# EAGLE board TOP_SENSOR_V1 (EAGLE 6.4)
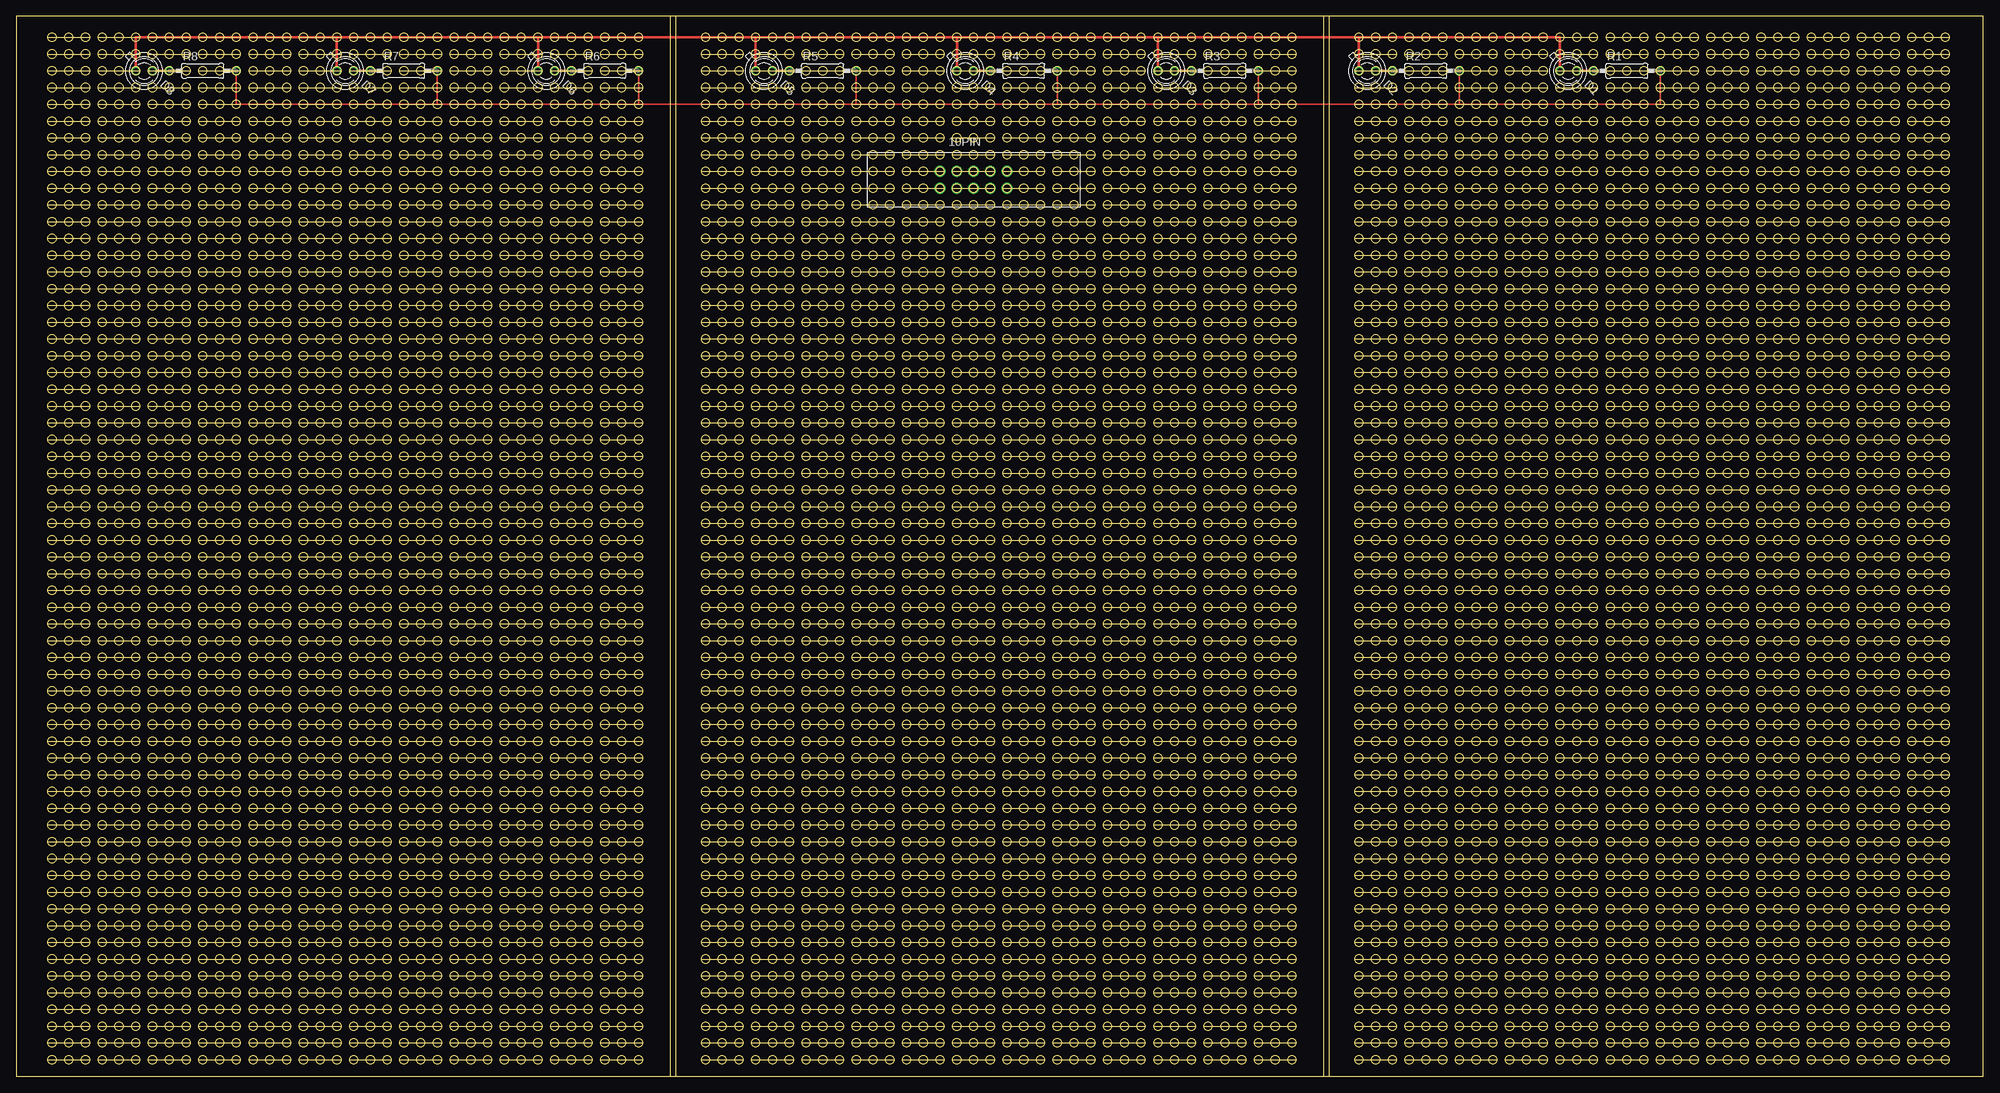
[diagram p0: board, top side]
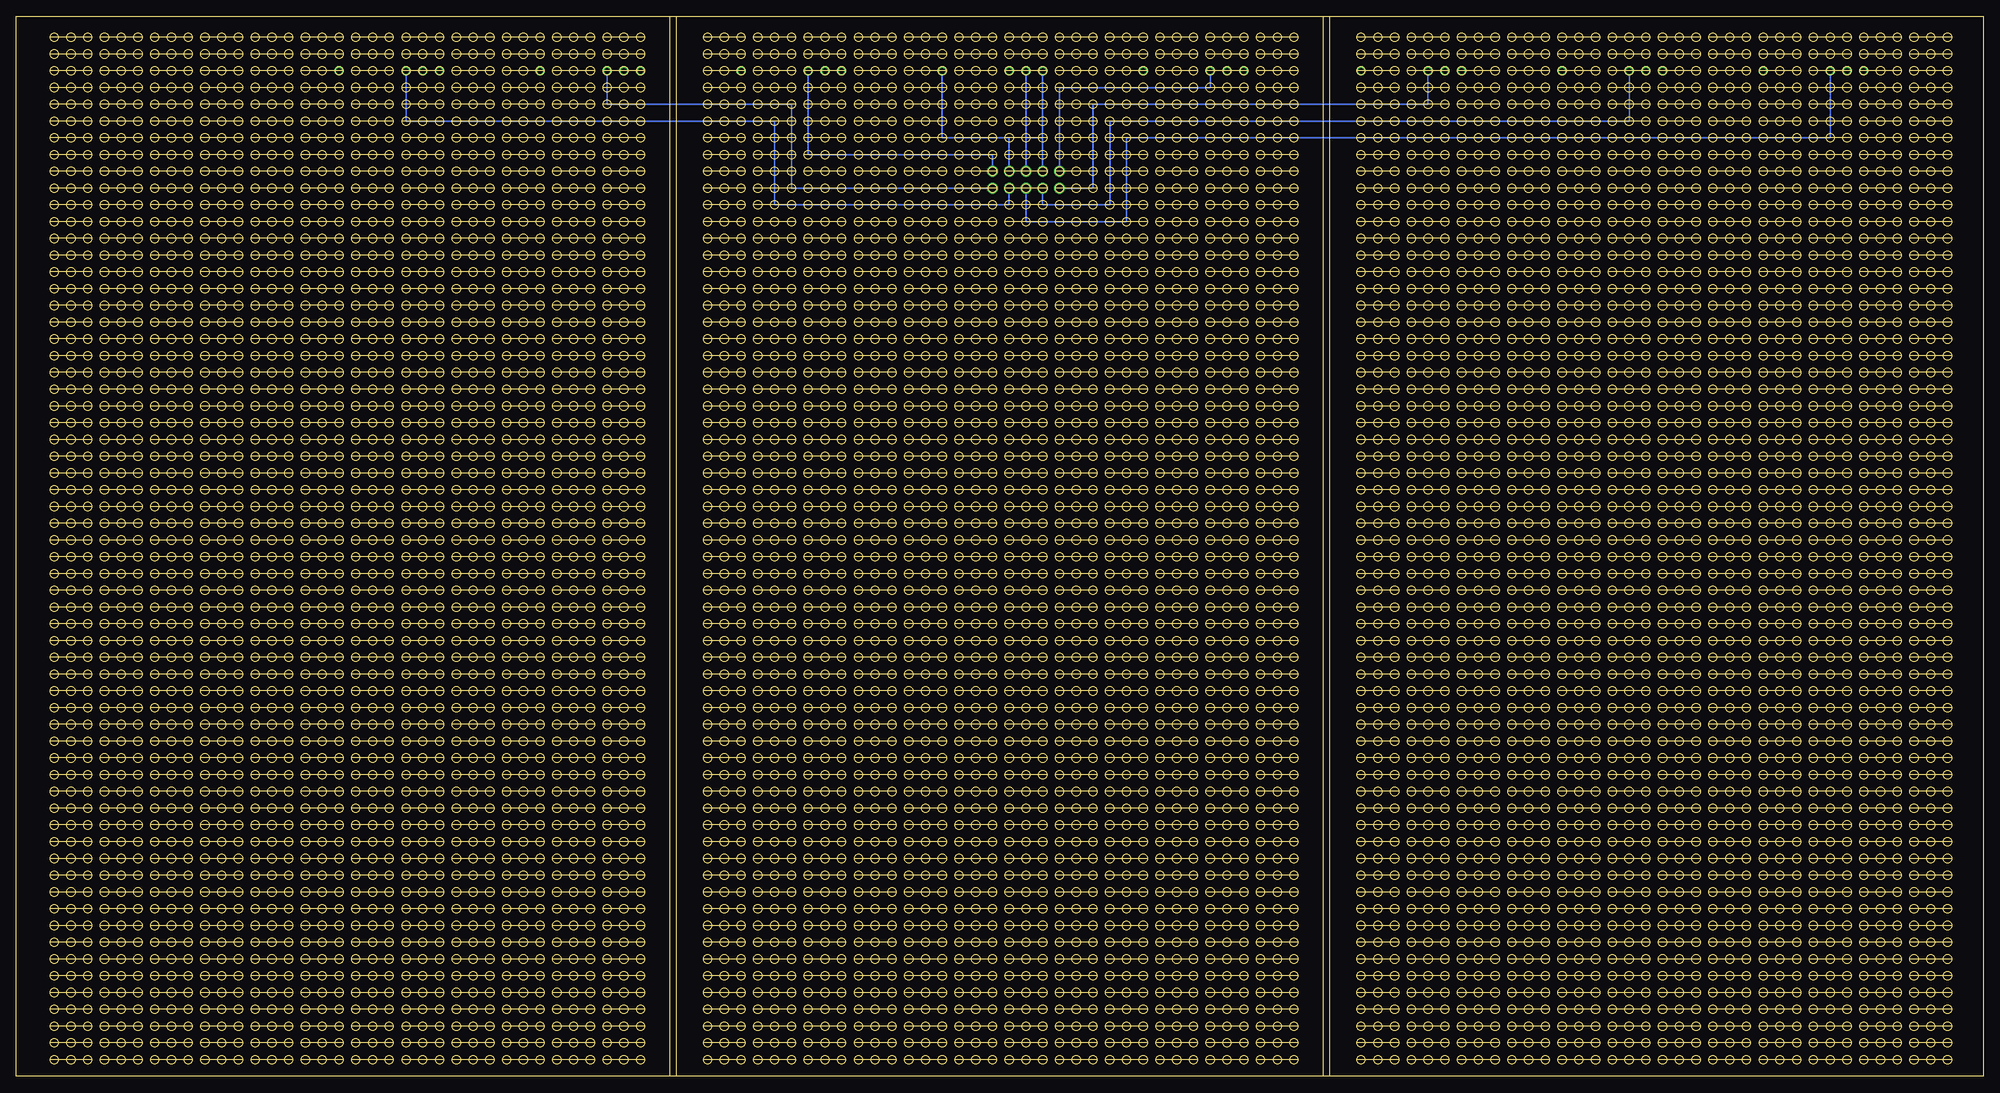
[diagram p1: board, bottom side, seen from below]

Size 298.12 x 160.63 mm. Coordinates in mm from the lower left corner, seen from the top.
Outline: 2244 segments
Outline: circle at 5.38,157.48 radius 0.64
Outline: circle at 7.92,157.48 radius 0.64
Outline: circle at 10.46,157.48 radius 0.64
Outline: circle at 13,157.48 radius 0.64
Outline: circle at 15.54,157.48 radius 0.64
Outline: circle at 18.09,157.48 radius 0.64
Outline: circle at 20.62,157.48 radius 0.64
Outline: circle at 23.16,157.48 radius 0.64
Outline: circle at 25.7,157.48 radius 0.64
Outline: circle at 28.25,157.48 radius 0.64
Outline: circle at 30.79,157.48 radius 0.64
Outline: circle at 33.33,157.48 radius 0.64
Outline: circle at 35.87,157.48 radius 0.64
Outline: circle at 38.41,157.48 radius 0.64
Outline: circle at 40.95,157.48 radius 0.64
Outline: circle at 43.48,157.48 radius 0.64
Outline: circle at 46.02,157.48 radius 0.64
Outline: circle at 48.56,157.48 radius 0.64
Outline: circle at 51.1,157.48 radius 0.64
Outline: circle at 53.65,157.48 radius 0.64
Copper layers (1*16): Top 0.035mm / dielectric 1.5mm / Bottom 0.035mm
Design rules "default": minimum track width 10mil, minimum drill 24mil, track to track 8mil, track to pad 8mil, pad to pad 8mil, via to via 8mil, smd to smd 8mil, copper to edge 40mil, drill to drill 8mil, minimum pad ring 10mil, minimum via ring 8mil, stop-mask expansion 4mil, vias tented up to drill 0mil, thermal gap 10mil

## Footprints (pad centres in the part's own frame; a part is rotated, then mirrored left to right if it is on the bottom)
61201022021 = drill 1.1: 1 5.08,1.27; 2 5.08,-1.27; 3 2.54,1.27; 4 2.54,-1.27; 5 0,1.27; 6 0,-1.27; 7 -2.54,1.27; 8 -2.54,-1.27; 9 -5.08,1.27; 10 -5.08,-1.27
BPX65 = drill 0.813 octagon: A -0.889,-0.889; K 0.889,0.889
0207/10 = drill 0.813 octagon: 1 -5.08,0; 2 5.08,0

## Placement (x,y rotation side)
10PIN  61201022021  [61201022021]  145.09,135.89 0 top
D1  Photo0  [BPX65]  235.25,152.4 315 top
D2  Photo1  [BPX65]  204.78,152.4 315 top
D3  Photo2  [BPX65]  174.3,152.4 315 top
D4  Photo3  [BPX65]  143.81,152.4 315 top
D5  Photo4  [BPX65]  113.34,152.4 315 top
D6  Photo5  [BPX65]  80.32,152.4 315 top
D7  Photo6  [BPX65]  49.84,152.4 315 top
D8  Photo7  [BPX65]  19.36,152.4 315 top
R1  10k  [0207/10]  244.15,152.4 0 top
R2  10k  [0207/10]  213.67,152.4 0 top
R3  10k  [0207/10]  183.19,152.4 0 top
R4  10k  [0207/10]  152.71,152.4 0 top
R5  10k  [0207/10]  122.23,152.4 0 top
R6  10k  [0207/10]  89.21,152.4 0 top
R7  10k  [0207/10]  58.73,152.4 0 top
R8  10k  [0207/10]  28.25,152.4 0 top

## Library data of the parts
10PIN = Wuerth_Elektronik_eiCan_05_Box_Header_IDC_Connectors_1_2
D1-D8 = opto-trans-siemens; MPN: BPX65.; OC_FARNELL: 327451; OC_NEWARK: 06WX2764
R1-R8 = resistor

## Nets
+3V3: 10PIN.5 D1.A D2.A D3.A D4.A D5.A D6.A D7.A D8.A
GND: 10PIN.3 R1.2 R2.2 R3.2 R4.2 R5.2 R6.2 R7.2 R8.2
PHOTO0: 10PIN.4 D1.K R1.1
PHOTO1: 10PIN.2 D2.K R2.1
PHOTO2: 10PIN.1 D3.K R3.1
PHOTO3: 10PIN.7 D4.K R4.1
PHOTO4: 10PIN.9 D5.K R5.1
PHOTO5: 10PIN.10 D6.K R6.1
PHOTO6: 10PIN.8 D7.K R7.1
PHOTO7: 10PIN.6 D8.K R8.1

## Tracks (layer width: path | path; a pad name or v marks a point on that pad's centre or on a via)
+3V3
  Top 0.406: D8.A 18.09,157.48 48.56,157.48 | D7.A 48.56,157.48 | D6.A 79.05,157.48 | 79.05,157.48 48.56,157.48 | D5.A 112.07,157.48 | 112.07,157.48 79.05,157.48 | D4.A 142.55,157.48 | 142.55,157.48 112.07,157.48 | D3.A 173.03,157.48 | 173.03,157.48 142.55,157.48 | D2.A 203.5,157.48 | 203.5,157.48 173.03,157.48 | D1.A 233.99,154.94 233.99,157.48 203.5,157.48
  Bottom 0.254: 10PIN.5 145.09,142.24 142.81,142.24 arc-90 142.56,142.49 D4.A
GND
  Top 0.254: R8.2 33.33,147.32 63.8,147.32 | 63.8,147.32 R7.2 | R6.2 94.29,147.32 | 94.29,147.32 63.8,147.32 | R5.2 127.31,147.32 | 127.31,147.32 94.29,147.32 | R4.2 157.78,147.32 | 157.78,147.32 127.31,147.32 | R3.2 188.27,147.32 | 188.27,147.32 157.78,147.32 | R2.2 218.75,147.32 | 218.75,147.32 188.27,147.32 | R1.2 249.22,147.32 218.75,147.32
  Bottom 0.254: 10PIN.3 147.62,142.24 157.78,142.24 R4.2
PHOTO0
  Top 0.406: D1.K R1.1
  Bottom 0.254: 10PIN.4 147.62,132.08 183.19,132.08 183.19,144.78 239.06,144.78 R1.1
PHOTO1
  Top 0.406: D2.K R2.1
  Bottom 0.254: 10PIN.2 180.65,134.62 180.65,147.32 208.59,147.32 R2.1
PHOTO2
  Top 0.406: D3.K R3.1
  Bottom 0.254: 10PIN.1 150.17,139.7 177.85,139.7 arc90 178.11,139.95 R3.1
PHOTO3
  Top 0.406: D4.K R4.1
  Bottom 0.254: 10PIN.7 142.55,142.24 144.82,142.24 arc90 145.07,142.49 D4.K
PHOTO4
  Top 0.406: D5.K R5.1
  Bottom 0.254: 10PIN.9 140,149.86 117.15,149.86 R5.1
PHOTO5
  Top 0.406: D6.K R6.1
  Bottom 0.254: 10PIN.10 135.18,134.62 arc-90 134.93,134.87 134.93,147.32 84.12,147.32 R6.1
PHOTO6
  Top 0.406: D7.K R7.1
  Bottom 0.254: 10PIN.8 142.55,132.08 132.39,132.08 132.39,144.78 53.65,144.78 R7.1
PHOTO7
  Top 0.406: D8.K R8.1
  Bottom 0.254: 10PIN.6 145.09,129.54 129.84,129.54 129.84,142.24 23.16,142.24 R8.1